# Altium PCB ATM90E2x-DB.PcbDoc
Units mil, origin at the board's own origin, x right, y up, seen from the top; angles counter-clockwise.
Board outline 4724.41 x 3543.31 mil, 2 copper layers (Top Layer, Bottom Layer); 87 components, 54 nets, 223 pads, 118 vias.
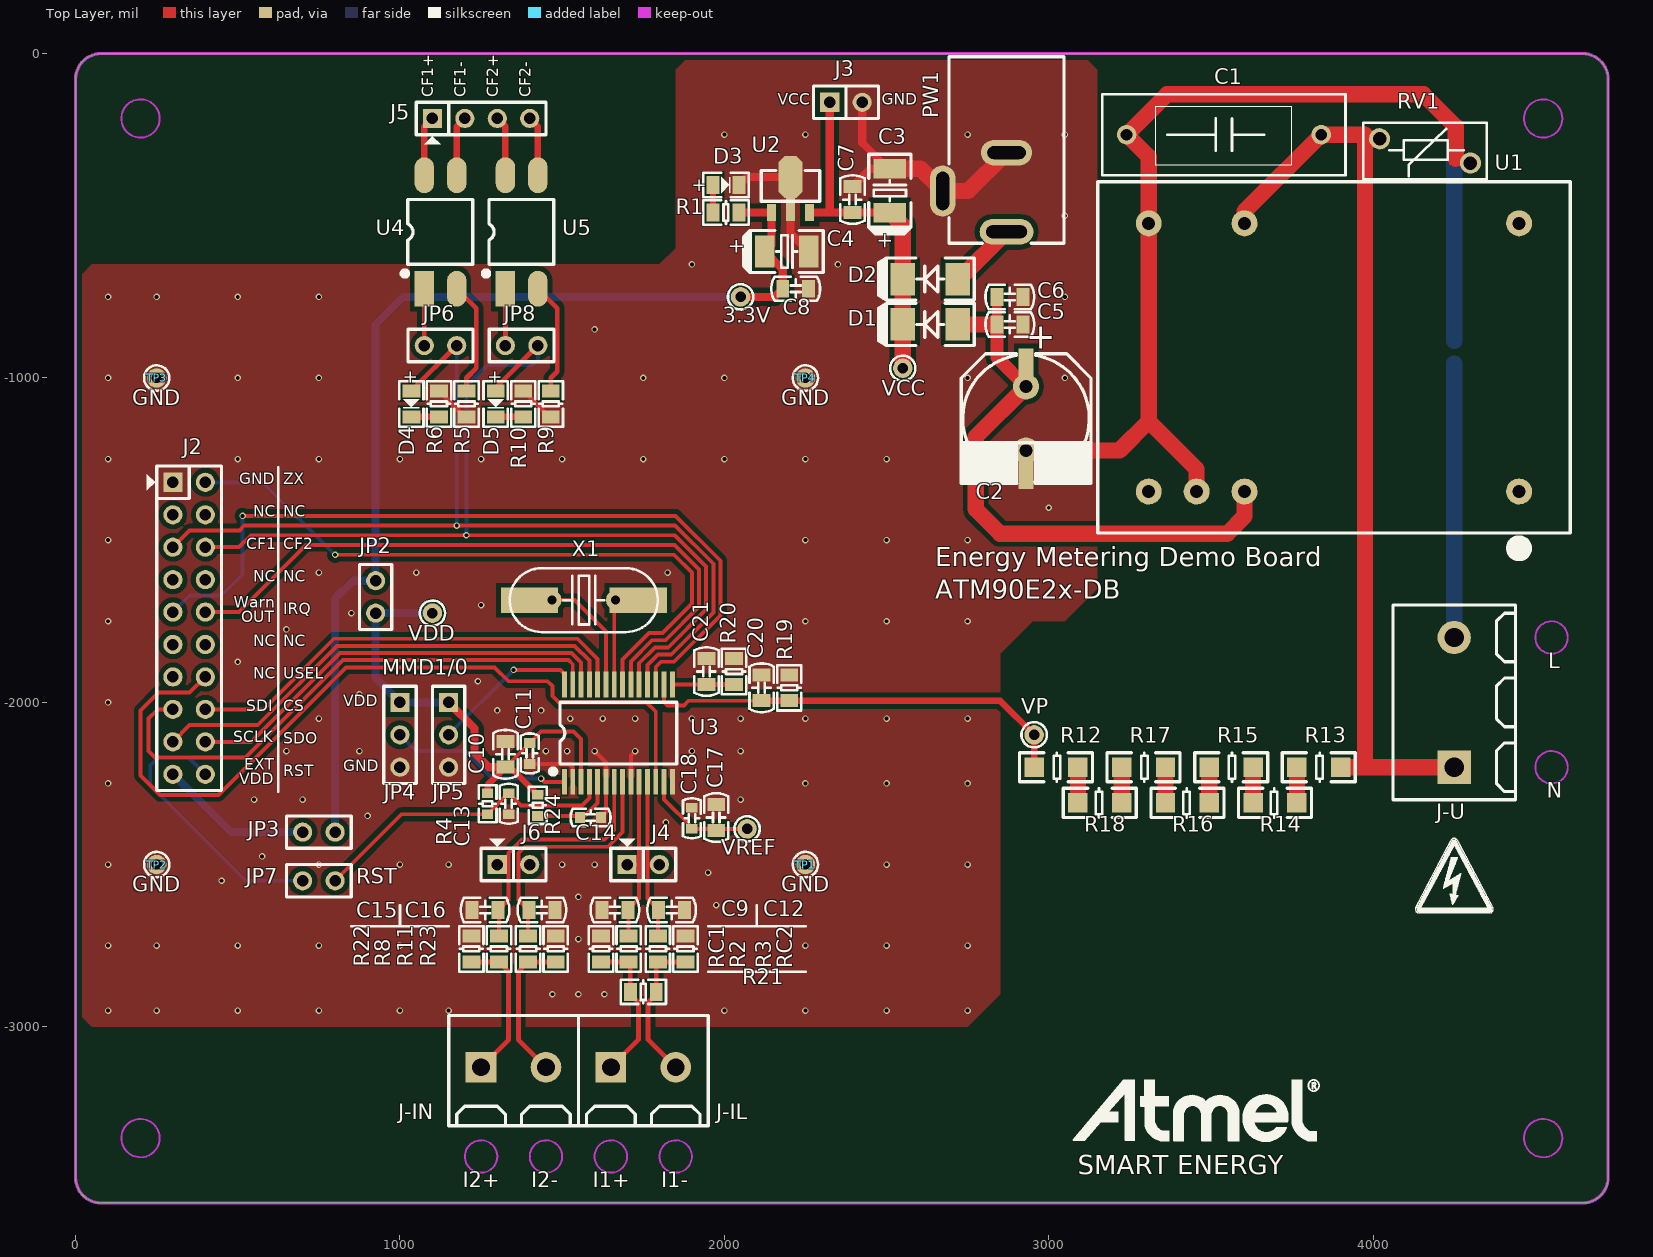
[diagram p0: Top Layer view]
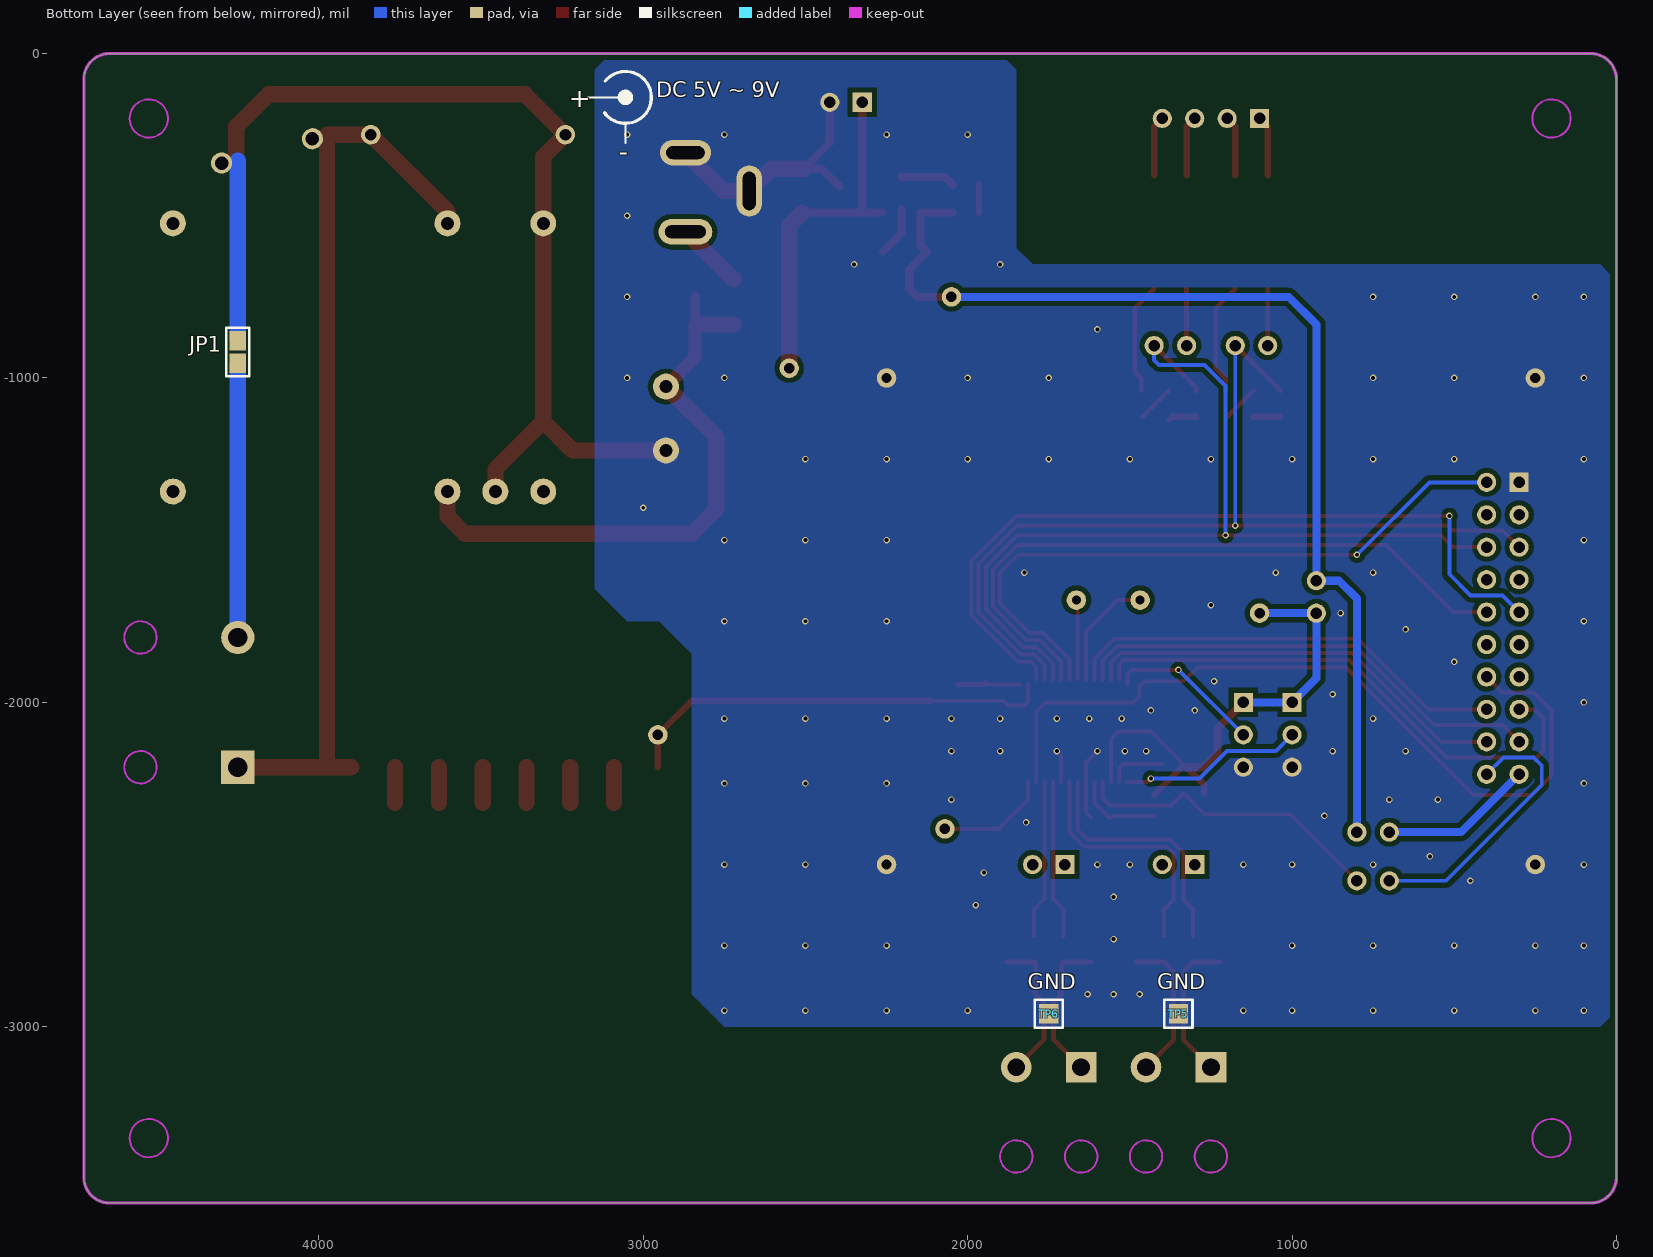
[diagram p1: Bottom Layer view, seen from below]
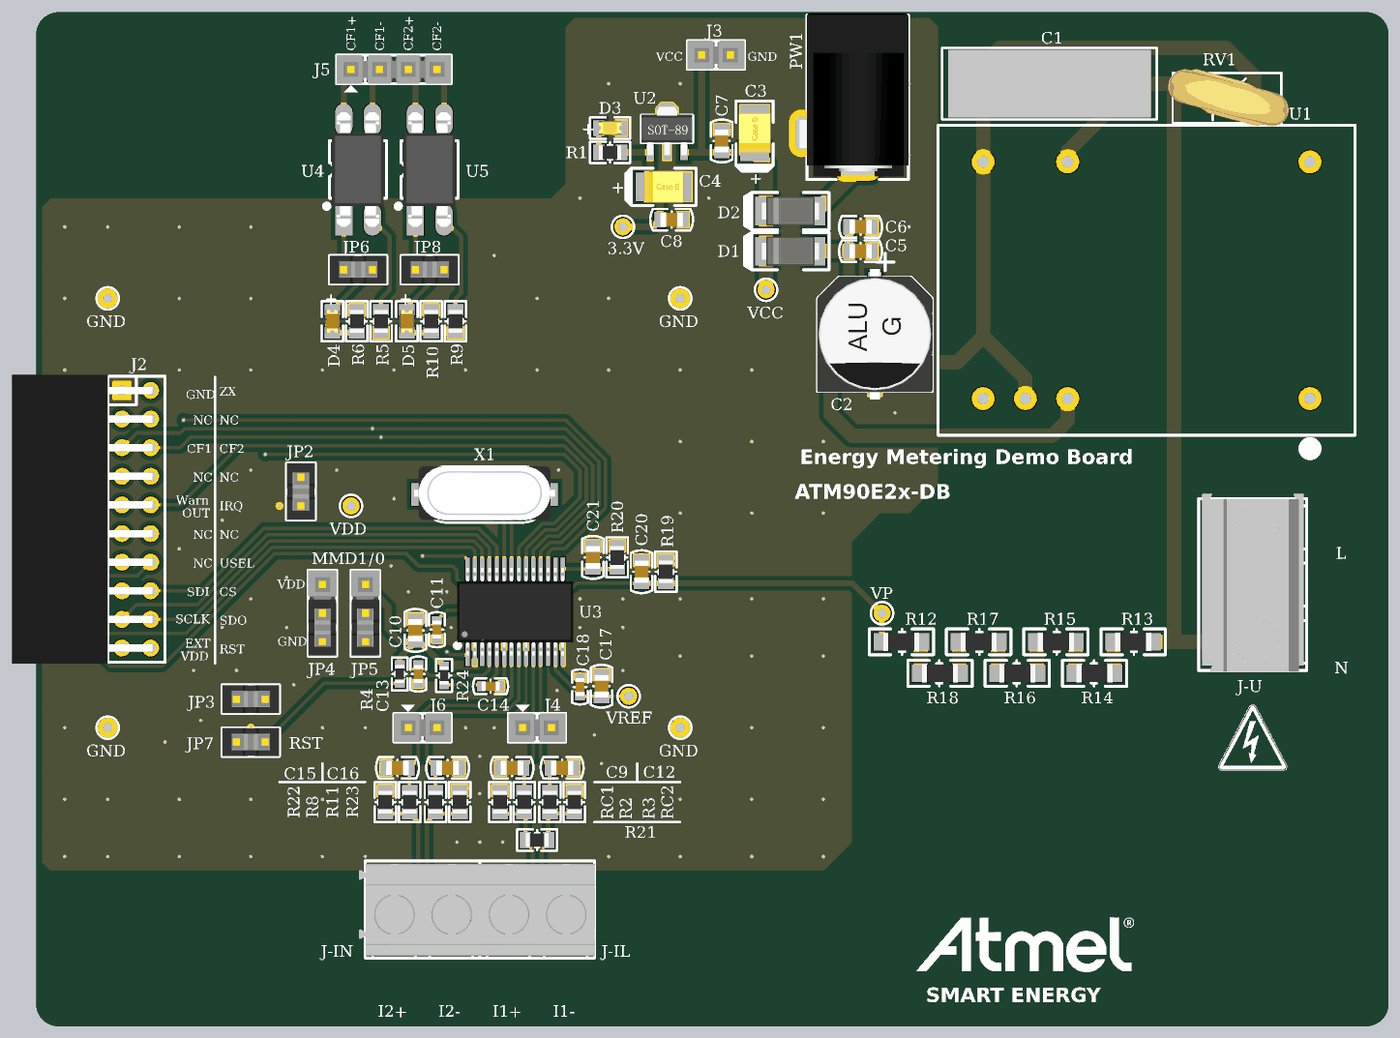
[diagram p2: 3D render of the assembled board from above, using the file's embedded part models]

## Layer stack, top to bottom
Top Layer: signal copper 1.4
Dielectric: dielectric 12.6, FR-4, Dk 4.8
Bottom Layer: signal copper 1.4

## Board outline
0,-3464.57 ccw(c78.74,-3464.57) 78.74,-3543.31 4645.67,-3543.31 ccw(c4645.67,-3464.57) 4724.41,-3464.57 4724.41,-78.74 ccw(c4645.67,-78.74) 4645.67,0 78.74,0 ccw(c78.74,-78.74) 0,-78.74

## Design rules (kind name [scope] priority, off if disabled: settings)
Clearance SSOP-28 [InComponent('U3')] p1: gap=6
Clearance Polygon [IsRegion] p2: gap=15
Clearance [All] p3: gap=10
MinimumSolderMaskSliver [All] p1 off: minsoldermaskwidth=10
NetAntennae [All] p1 off: netantennaetolerance=0
PolygonConnect [All] p1: connectstyle=Direct reliefconductorwidth=20 reliefentries=4 polygonreliefangle="90 Angle" airgapwidth=15
RoutingVias [All] p1: holewidth=28 width=50 viastyle="Through Hole" minholewidth=28 minwidth=50 maxholewidth=28 maxwidth=50
SilkToSilkClearance [All] p1 off: silktosilkclearance=10
SilkscreenOverComponentPads [All] p1 off: minsilkscreentomaskgap=10
SolderMaskExpansion [All] p1: expansion=4
Width [All] p1: maxlimit=100 minlimit=8 preferedwidth=10
24 further rules are at their usual default settings.

## Components (designator, comment, footprint, x,y, rotation, side; value= is the part's Value field where it differs from the comment)
3.3V "TEST-POINT" TP 2050,-750 r0 top
C1 "100pF" C_FILM_600 3840,-250 r180 top
C2 "220uF" C_ALUM_MIX_10X10 2930,-1125 r180 top
C3 "22uF" C_TANT_B3528 2510,-490 r90 top
C4 "22uF" C_TANT_B3528 2125,-610 r0 top
C5 "10uF" C0805 2920,-835 r180 top
C6 "0.1uF" C0805 2920,-750 r180 top
C7 "0.1uF" C0805 2395,-410 r270 top
C8 "0.1uF" C0805 2260,-725 r180 top
C9 "330nF" C0805 1622.5,-2640 r0 top
C10 "10uF" C0805 1325,-2200 r90 top
C11 "0.1uF" C0603 1400,-2125 r270 top
C12 "330nF" C0805 1797.5,-2640 r0 top
C13 "0.1uF" C0603 1335,-2345 r90 top
C14 "0.1uF" C0603 1620,-2355 r180 top
C15 "33nF" C0805 1222.5,-2640 r0 top
C16 "33nF" C0805 1397.5,-2640 r0 top
C17 "4.7uF" C0805 1975,-2315 r270 top
C18 "0.1uF" C0603 1900,-2325 r270 top
C20 "33nF" C0805 2115,-1915 r270 top
C21 "33nF" C0805 1945,-1865 r270 top
D1 "1N4007" "SMA DO-214AC" 2720,-835 r180 top
D2 "1N4007" "SMA DO-214AC" 2720,-695 r180 top
D3 "Yellow" LED-0805Y 2005,-405 r0 top
D4 "Red" LED-0805R 1035,-1080 r270 top
D5 "Red" LED-0805R 1295,-1080 r270 top
J2 "HDR2X10" HDR2X10 300,-1321.65 r270 top locked
J3 "HDR1X2" HDR1X2 2325,-150 r0 top
J4 "CON-2" HDR1X2(UPER) 1700,-2500 r0 top
J5 "HDR1X4" HDR1X4 1100,-200 r0 top
J6 "CON-2" HDR1X2(UPER) 1300,-2500 r0 top
J-IL "" TE-1776119-2 1650,-3125 r0 top
J-IN "" TE-1776119-2 1250,-3125 r0 top
J-U "" TE-282843-2 4250,-2200 r90 top
JP1 "JMP" JMP-SMD 4250,-955 r90 bottom
JP2 "JMP" JMP 925,-1625 r270 top (schematic designator JP7)
JP3 "JMP" JMP 800,-2400 r180 top (schematic designator JP7)
JP4 "JMP3" JMP3 1000,-2000 r270 top (schematic designator JP3)
JP5 "JMP3" JMP3 1150,-2000 r270 top (schematic designator JP4)
JP6 "JMP" JMP 1175,-900 r180 top
JP7 "JMP" JMP 700,-2550 r0 top
JP8 "JMP" JMP 1425,-900 r180 top
PW1 "PowerJack" POWERJACKET2.5 2870,-549.37 r180 top
R1 "510R" R0805 1965,-490 r0 top
R2 "100R" R0805 1705,-2720 r270 top
R3 "100R" R0805 1795,-2720 r270 top
R4 "10K" R0603 1270,-2345 r90 top
R5 "510R" R0805 1205,-1120 r90 top
R6 "510R" R0805 1120,-1040 r270 top
R8 "1K" R0805 1305,-2720 r270 top
R9 "510R" R0805 1465,-1120 r90 top
R10 "510R" R0805 1380,-1040 r270 top
R11 "1K" R0805 1395,-2720 r270 top
R12 "120K" R1206 3090,-2200 r180 top
R13 "120K" R1206 3900,-2200 r180 top
R14 "120K" R1206 3630,-2310 r0 top
R15 "120K" R1206 3630,-2200 r180 top
R16 "120K" R1206 3360,-2310 r0 top
R17 "120K" R1206 3360,-2200 r180 top
R18 "120K" R1206 3090,-2310 r0 top
R19 "1K" R0805 2200,-1915 r270 top
R20 "1K" R0805 2030,-1865 r270 top
R21 "51R" R0805 1790,-2892.5 r180 top
R22 "2R4" R0805 1220,-2720 r270 top
R23 "2R4" R0805 1480,-2800 r90 top
R24 "0R" R0603 1425,-2350 r90 top
RC1 "2R4" R0805 1620,-2720 r270 top
RC2 "2R4" R0805 1880,-2800 r90 top
RV1 "RES-V" VDRS10P510BSE 4160,-300 r270 top
TP1 "GND" TP 2250,-2500 r0 top (schematic designator GND)
TP2 "GND" TP 250,-2500 r0 top
TP3 "GND" TP 250,-1000 r0 top (schematic designator TP6)
TP4 "GND" TP 2250,-1000 r0 top (schematic designator TP5)
TP5 "GND" TP-SMD 1350,-2960 r180 bottom (schematic designator TP8)
TP6 "GND" TP-SMD 1750,-2960 r180 bottom (schematic designator TP9)
U1 "TMLM04109" TMLM04112 4450,-1350 r180 top
U2 "78L33" SOT-89 2145,-490 r0 top
U3 "ATM90E25" SSOP-28 1507,-2245 r90 top
U4 "PS2501" PS2501L-1 1075,-725 r90 top
U5 "PS2501" PS2501L-1 1325,-725 r90 top
VCC "TEST-POINT" TP 2550,-970 r0 top
VDD "TEST-POINT" TP 1100,-1725 r0 top
VP "TEST-POINT" TP 2955,-2100 r0 top
VREF "TEST-POINT" TP 2070,-2390 r0 top
X1 "8.192MHz" XTAL-MIX-49 1468.15,-1685 r0 top
? "Comment" Logo-ATMEL 3075,-3350 r0 top
? "Comment" "HIGH VOLTAGE (40%)" 4250,-2450 r0 top

## Footprints (in the part's own frame and the unit in brackets; to place one, negate y for a bottom-side part, rotate by r counter-clockwise, add the part's x,y. Pads: shape width x height; smd on the part's side, far side on the other; paste and mask are expansions set on the pad)
C0603 [mil] "C0603"
  rect 30x35 smd: 1(0,0) 2(65,0)
  silkscreen extent -29,-28 94,28, body extent 1,-16 64,16, height 35
C0805 [mil] "C0805"
  rect 40x55 smd: 1(0,0) 2(80,0)
  silkscreen extent -35,-38 115,38, body extent 1,-25 79,25, height 39
C_ALUM_MIX_10X10 [mil] "C_ALUM_MIX_10x10"
  round 80 hole 40: 1(0,-98.43) 2(0,98.43)
  rect 47.25x137.79 smd: 1(0,-147.64) 2(0,147.64)
  silkscreen extent -200,-200 200,200, body extent -203,-228 203,228, height 402
C_FILM_600 [mil]
  round 60 hole 36: 1(0,0) 2(600,0)
  silkscreen extent -75,-125 675,125, body extent -54,-118 654,118, height 111
C_TANT_B3528 [mil] "C_TANT_B3528"
  rect 60x100 smd: 1(0,0) 2(135,0)
  silkscreen extent -65,-65 180,65, body extent -1,-55 136,55, height 75
HDR1X2 [mm] "Connector; Header; 2 Position"
  rect 1.5x1.5 hole 0.9: 1(0,0)
  round 1.5 hole 0.9: 2(2.54,0)
  silkscreen extent -1.27,-1.27 3.81,1.27, body extent -1.27,-1.27 3.81,1.27, height 8.38
HDR1X2(UPER) [mm]
  rect 1.5x1.5 hole 0.9: 1(0,0)
  round 1.5 hole 0.9: 2(2.54,0)
  silkscreen extent -1.27,-1.27 3.81,2.03, body extent -1.27,-1.27 3.81,1.27, height 8.38
HDR1X4 [mm]
  rect 1.5x1.5 hole 0.9: 1(0,0)
  round 1.5 hole 0.9: 2(2.54,0) 3(5.08,0) 4(7.62,0)
  silkscreen extent -1.27,-2.03 8.89,1.27, body extent -1.27,-1.27 8.89,1.27, height 8.38
HDR2X10 [mm]
  rect 1.5x1.5 hole 0.9: 1(0,0)
  round 1.5 hole 0.9: 2(0,2.54) 3(2.54,0) 4(2.54,2.54) 5(5.08,0) 6(5.08,2.54) 7(7.62,0) 8(7.62,2.54) 9(10.16,0) 10(10.16,2.54) 11(12.7,0) 12(12.7,2.54) 13(15.24,0) 14(15.24,2.54) 15(17.78,0) 16(17.78,2.54) 17(20.32,0) 18(20.32,2.54) 19(22.86,0) 20(22.86,2.54)
  silkscreen extent -1.27,-2.03 24.13,3.81, body extent -1.4,-9.77 24.25,2.83, height 5.04
"HIGH VOLTAGE (40%)" [mil]
  silkscreen extent -120,-199 120,32
JMP [mm] "JMP"
  round 1.5 hole 0.9: 1(0,0) 2(2.54,0)
  silkscreen extent -1.27,-1.27 3.81,1.27, body extent -1.27,-1.27 3.81,1.27, height 8.51
JMP3 [mm] "JMP-SMD"
  rect 1.5x1.5 hole 0.9: 1(0,0)
  round 1.5 hole 0.9: 2(2.54,0) 3(5.08,0)
  silkscreen extent -1.27,-1.27 6.35,1.27, body extent -1.27,-1.27 6.35,1.27, height 8.51
JMP-SMD [mil] "JMP-SMD"
  rect 60x50 smd: 1(0,0) 2(70,0)
  silkscreen extent -40,-35 110,35
LED-0805R [mil] "LED 0805, Red"
  rect 40x55 smd: A(-40,0) K(40,0)
  silkscreen extent -70,-38 70,38, body extent -40,-25 40,25, height 43
LED-0805Y [mil] "LED 0805, Yellow"
  rect 40x55 smd: A(-40,0) K(40,0)
  silkscreen extent -70,-38 70,38, body extent -40,-25 40,25, height 43
Logo-ATMEL [mil]
  silkscreen extent 0,-4 760,187
POWERJACKET2.5 [mm] "PowerJacket2.5"
  oval 4.2x2 hole 1 slot 3.2 at 0 deg: 1(0,0)
  oval 4x2 hole 1 slot 3 at 0 deg: 2(0,-6.2)
  oval 2x4 hole 1 slot 3 at 90 deg: 3(5,-3.2)
  silkscreen extent -4.5,-13.7 4.5,0.9, body extent -4.5,-13.85 5.3,0.65, height 11.03
PS2501L-1 [mil] "PS2501L-1"
  rect 110.24x60 smd: 1(0,0)
  oval 110.24x60 smd: 2(0,-100) 3(350,-100) 4(350,0)
  silkscreen extent 39,-149 275,68, body extent -25,-140 375,41, height 152
R0603 [mil] "R0603"
  rect 30x35 smd: 1(0,0) 2(65,0)
  silkscreen extent -25,-28 90,28, body extent 1,-16 64,16, height 16
R0805 [mil] "R0805"
  rect 40x55 smd: 1(0,0) 2(80,0)
  silkscreen extent -30,-38 110,38, body extent 1,-25 79,25, height 20
R1206 [mil] "R1206"
  rect 60x60 smd: 1(0,0) 2(135,0)
  silkscreen extent -45,-45 180,45, body extent 5,-31 130,32, height 22
"SMA DO-214AC" [mil] "DIODE, SMA DO-214AC"
  rect 75x100 smd: A(0,0) K(170,0)
  silkscreen extent -50,-65 245,65, body extent -17,-51 187,51, height 95
SOT-89 [mm] "SOT-89"
  rect 0.7x1.35 smd: 1(0,0) 3(3,0)
  rect 0.7x1.8 smd: 2(1.5,0.225)
  oct 1.9x3.3 smd: 2(1.5,2.775)
  silkscreen extent -0.79,0.88 3.79,3.29, body extent -0.75,-0.24 3.75,4.05, height 1.51
SSOP-28 [mm] "SSOP-28"
  rect 2x0.38 smd: 1(0,0) 2(0,-0.65) 3(0,-1.3) 4(0,-1.95) 5(0,-2.6) 6(0,-3.25) 7(0,-3.9) 8(0,-4.55) 9(0,-5.2) 10(0,-5.85) 11(0,-6.5) 12(0,-7.15) 13(0,-7.8) 14(0,-8.45) 15(7.62,-8.45) 16(7.62,-7.8) 17(7.62,-7.15) 18(7.62,-6.5) 19(7.62,-5.85) 20(7.62,-5.2) 21(7.62,-4.55) 22(7.62,-3.9) 23(7.62,-3.25) 24(7.62,-2.6) 25(7.62,-1.95) 26(7.62,-1.3) 27(7.62,-0.65) 28(7.62,0)
  silkscreen extent 0.61,-8.8 6.22,1.09, body extent -0.07,-9.39 7.69,0.94, height 2.15
TE-282843-2 [mm]
  rect 2.6x2.6 hole 1.5: 1(0,0)
  round 2.6 hole 1.5: 2(10.16,0)
  silkscreen extent -2.54,-4.8 12.7,4.8, body extent -2.6,-4.51 13.14,4.49, height 15.22
TE-1776119-2 [mm]
  rect 2.4x2.4 hole 1.4: 1(0,0)
  round 2.4 hole 1.4: 2(5.08,0)
  silkscreen extent -2.54,-4.57 7.62,4.06, body extent -3.09,-4.39 7.67,3.81, height 10.04
TMLM04112 [mil] "TMLM04112"
  round 80 hole 40: 1(0,0) 2(846.45,0) 3(994.09,0) 4(1141.73,0) 5(1141.73,-826.77) 6(846.45,-826.77) 7(0,-826.77)
  silkscreen extent -157,-955 1299,195, body extent -159,-953 1301,127, height 675
TP [mil] "TP"
  round 60 hole 32: 1(0,0)
  silkscreen extent -39,-39 39,39
TP-SMD [mil] "JMP-SMD"
  rect 60x60 smd: 1(0,0)
  silkscreen extent -43,-43 43,43
VDRS10P510BSE [mil] "VDRS10P510BSE"
  round 65 hole 42: 1(-37.5,-140) 2(37.5,140)
  silkscreen extent -87,-190 88,190, body extent -123,-222 123,232, height 472
XTAL-MIX-49 [mm]
  rect 4.5x2 smd: 1(-1.75,0) 2(6.75,0)
  round 1.524 hole 0.711: 1(0,0) 2(5,0)
  silkscreen extent -3.3,-2.5 8.3,2.5, body extent -3.75,-2.29 8.75,2.51, height 4.05

## Part data
C1: library part CAP-FILM
C2: library part CAP-ALUM
C3 C4: library part CAP-TANT
C5 C6 C7 C8 C9 C10 C11 C12 C13 C14 C15 C16 C17 C18 C20 C21: library part CAP
D1 D2: library part DIODE
D3 D4 D5: library part LED
J-IL J-IN J-U: library part Terminal-Screw-2
R1 R2 R3 R4 R5 R6 R8 R9 R10 R11 R12 R13 R14 R15 R16 R17 R18 R19 R20 R21 R22 R23 R24 RC1 RC2: library part RES
TP1 TP2 TP3 TP4 TP5 TP6: library part TEST-POINT
U1: library part TMLM04112
U2: library part 78LXX
U4 U5: library part NEC2501, "NEC2501"
X1: library part XTAL-T

## Via types
v1: diameter 20, hole 12, Top Layer to Bottom Layer, 118 vias

## Nets (pads, with @x,y where several pads share a name; then routed paths per layer and width w, separated by ;. In a path a pad name is that pad's centre, name@x,y a point inside that pad or via, vN(x,y) a via of type N, cw(c..) or ccw(c..) an arc to the next point about the centre after c; other vN are vias at no path point)
AVDD: C14.2 R24.1 U3.5 | length 270.1
  Top Layer w12: R24.1 1550,-2350 C14.2 1564.36,-2355 1609.36,-2310 U3.5
CF1: D4.A J2.5 JP6.1 U3.18 | length 2960.8
  Top Layer w12: J2.5 351.65,-1470 505,-1470 520,-1455 v1(1175,-1455) 1848.34,-1455 1966,-1572.66 1966,-1722.89 1836.22,-1852.67 1795.25,-1852.67 1762.9,-1885.01 U3.18@1762.9,-1930.04
  Top Layer w15: D4.A JP6.1
  Bottom Layer w12: v1(1175,-1455) JP6.1
CF2: D5.A J2.6 JP8.1 U3.19 | length 3009.1
  Top Layer w12: J2.6 503.35,-1521.65 540,-1485 v1(1205,-1485) 1847.23,-1485 1944,-1581.77 1944,-1713.77 1827.11,-1830.67 1786.14,-1830.67 1737.31,-1879.49 U3.19@1737.31,-1930.04
  Top Layer w15: D5.A 1295,-1030 JP8.1
  Bottom Layer w12: v1(1205,-1485) 1205,-1025 1270,-960 1410,-960 1425,-945 JP8.1
CS: J2.16 U3.24 | length 1389.2
  Top Layer w12: J2.16 578.9,-2021.65 796.55,-1804 1547.34,-1804 1609.36,-1866.02 U3.24@1609.36,-1930.04
GND: C1.2 C2.2 C3.2 C4.2 C5.1 C6.1 C7.1 C8.1 C9.1 C10.2 C11.2 C12.2 C13.1 C14.1 C15.1 C16.2 C17.1 C18.1 C20.1 C21.1 D3.K J2.1 J3.2 JP1.2 JP4.3 JP5.3 PW1.2 PW1.3 R5.1 R6.1 R9.1 R10.1 R19.1 R20.1 R22.1 R23.2 RC1.1 RC2.2 RV1.2 TP1.1 TP2.1 TP3.1 TP4.1 TP5.1 TP6.1 U1.3 U1.5 U2.2 U3.2 U3.6 U3.9 U3.14 | length 5236.4
  Top Layer w12: C11.2 1400.37,-2189.63 1521.11,-2189.63 1532.59,-2201.11 U3.2 ; v1(1600,-2150) 1634.95,-2184.95 U3.6 1634.95,-2340.05 C14.1 ; U3.9 1711.72,-2163.28 v1(1725,-2150)
  Top Layer w15: R6.1 R5.1@1200,-1120 ; R10.1 R9.1@1460,-1120
  Top Layer w25: D3.K 2069.25,-380.75 U2.2@2204.06,-380.75 ; U2.2@2204.06,-481.14 2204.06,-554.06 C4.2 ; C7.1 2450,-355 2505,-355 2425,-275 J3.2
  Top Layer w50: C3.2@2505,-355 C3.2 2604.76,-355 PW1.3 2751.89,-423.39 PW1.2 ; C2.2@2930,-1223.43 3218.11,-1223.43 3308.27,-1133.27 ; U1.3 3455.91,-1280.91 3308.27,-1133.27 ; 4255,-325 4255,-225 4155,-125 3365,-125 C1.2 3308.27,-318.27 U1.5 3308.27,-1133.27
  Bottom Layer w50: JP1.2 4250,-330
  other v1: 100,-2950 250,-2950 500,-2950 750,-2950 1000,-2950 1150,-2950 2000,-2950 2250,-2950 2500,-2950 2750,-2950 1470,-2900 1550,-2900 1630,-2900 100,-2750 250,-2750 500,-2750 750,-2750 1000,-2750 2250,-2750 2500,-2750 2750,-2750 1550,-2730 1975,-2625 1550,-2600 450,-2550 1950,-2525 100,-2500 750,-2500 1000,-2500 1150,-2500 1500,-2500 1600,-2500 2500,-2500 2750,-2500 575,-2475 1820,-2370 900,-2350 550,-2300 700,-2300 2050,-2300 100,-2250 2250,-2250 2500,-2250 2750,-2250 650,-2150 875,-2150 1450,-2150 1515,-2150 1900,-2150 2050,-2150 750,-2050 1525,-2050 1625,-2050 1725,-2050 1900,-2050 2050,-2050 2250,-2050 2500,-2050 2750,-2050 1300,-2025 1435,-2025 100,-2000 875,-1975 1240,-1935 500,-1875 650,-1775 100,-1750 2250,-1750 2500,-1750 2750,-1750 850,-1725 1250,-1700 750,-1600 1050,-1600 1825,-1600 100,-1500 2250,-1500 2500,-1500 2750,-1500 3000,-1400 100,-1250 500,-1250 750,-1250 1000,-1250 1250,-1250 1500,-1250 1750,-1250 2000,-1250 2250,-1250 2500,-1250 100,-1000 500,-1000 750,-1000 1750,-1000 2000,-1000 2750,-1000 3050,-1000 1600,-850 100,-750 250,-750 500,-750 750,-750 3050,-750 1900,-650 2350,-650 3050,-500 2000,-250 2250,-250 2750,-250 3050,-250
I1N: C12.1 J4.2 R3.1 U3.11 | length 526.4
  Top Layer w12: U3.11 1762.9,-2500 ; R3.1 C12.1@1795,-2640 ; C12.1 1762.9,-2605.41 1762.9,-2500 ; J4.2 1762.9,-2500
I1P: C9.2 J4.1 R2.1 U3.10 | length 526.7
  Top Layer w12: J4.1 1737.31,-2500 ; C9.2 1737.31,-2605.18 1737.31,-2500 ; R2.1 C9.2@1705,-2640 ; U3.10 1737.31,-2500
I2N: C16.1 J6.2 R11.1 U3.8 | length 851.4
  Top Layer w12: R11.1 1395,-2640 1365,-2610 1365,-2607.5 ; C16.1 1365,-2607.5 ; J6.2 1365,-2500 ; U3.8 1686.13,-2400 1641.13,-2445 1385,-2445 1365,-2465 1365,-2500 ; 1365,-2607.5 1365,-2500
I2P: C15.2 J6.1 R8.1 U3.7 | length 852.8
  Top Layer w12: J6.1 1335,-2500 ; C15.2 1335,-2607.5 ; R8.1 1305,-2640 1335,-2610 1335,-2607.5 ; U3.7 1660.54,-2393.59 1631.13,-2423 1375.89,-2423 1335,-2463.89 1335,-2500 ; 1335,-2607.5 1335,-2500
IRQ: J2.10 U3.20 | length 2089.3
  Top Layer w12: J2.10 503.35,-1721.65 710,-1515 1846.11,-1515 1922,-1590.89 1922,-1704.66 1817.99,-1808.67 1777.02,-1808.67 1711.72,-1873.97 U3.20@1711.72,-1930.04
L: J-U.2 JP1.1 | length 845
  Bottom Layer w50: J-U.2 JP1.1
N: C1.1 J-U.1 R13.1 RV1.1 U1.6 | length 2806.2
  Top Layer w50: U1.6 3603.55,-486.45 C1.1 3975,-250 3975,-2200 ; R13.1 J-U.1
Net3.3V_1: 3.3V.1 C4.1 C8.2 JP2.1 JP3.1 R1.2 U2.1 | length 3324.4
  Top Layer w25: R1.2 U2.1 2145,-590 C4.1 2180,-665 C8.2 2155,-750 3.3V.1
  Bottom Layer w25: JP3.1 800,-1680 855,-1625 JP2.1 925,-835 1010,-750 3.3V.1
NetC2_1: C2.1 C5.2 C6.2 D1.A U1.2 | length 1824.7
  Top Layer w30: C5.2 C6.2
  Top Layer w40: C5.2 2840,-936.57 C2.1@2930,-1026.57
  Top Layer w50: D1.A C5.2@2830,-835 ; C2.1@2930,-1026.57 2775,-1181.57 2775,-1405 2850,-1480 3550,-1480 3603.55,-1426.45 U1.2
NetC13_2: C13.2 JP7.2 R4.1 U3.4 | length 970.5
  Top Layer w12: JP7.2 1005,-2345 R4.1 C13.2 1372.5,-2317.5 1561.27,-2317.5 1583.77,-2295 U3.4
NetC17_2: C17.2 C18.2 U3.13 VREF.1 | length 350.6
  Top Layer w12: U3.13 1814.09,-2299.09 1900,-2385 C18.2 VREF.1
NetD2_A: D2.A PW1.1 | length 210.3
  Top Layer w50: D2.A 2724.37,-695 PW1.1
NetD3_A: D3.A R1.1 | length 85
  Top Layer w20: R1.1 D3.A
NetD4_K: D4.K R6.2 | length 85
  Top Layer w20: D4.K R6.2
NetD5_K: D5.K R10.2 | length 89.1
  Top Layer w15: R10.2@1370,-1120 R10.2@1380,-1130
  Top Layer w20: D5.K R10.2@1370,-1120
NetJ5_1: J5.1 U4.4 | length 185.4
  Top Layer w20: U4.4 1075,-225 J5.1
NetJ5_2: J5.2 U4.3 | length 185.4
  Top Layer w20: U4.3 1175,-225 J5.2
NetJ5_3: J5.3 U5.4 | length 185.4
  Top Layer w20: J5.3 1325,-225 U5.4
NetJ5_4: J5.4 U5.3 | length 185.4
  Top Layer w20: J5.4 1425,-225 U5.3
NetJ-IL_1: J-IL.1 R2.2 R21.2 RC1.2 | length 452.6
  Top Layer w15: RC1.2 R2.2 1710,-2805 R21.2 ; J-IL.1 1735,-3040 1735,-2925 R21.2@1710,-2900 ; R21.2@1715,-2895 R21.2@1715,-2892.5
NetJ-IL_2: J-IL.2 R3.2 R21.1 RC2.1 | length 459.7
  Top Layer w12: R21.1@1795,-2895 R21.1@1795,-2892.5
  Top Layer w15: R21.1 1790,-2805 R3.2 RC2.1 ; R21.1@1795,-2895 1765,-2925 1765,-3040 J-IL.2
NetJ-IN_1: J-IN.1 R8.2 R22.2 | length 457.6
  Top Layer w15: R22.2 R8.2 1335,-2830 1335,-3040 J-IN.1
NetJ-IN_2: J-IN.2 R11.2 R23.1 | length 457.6
  Top Layer w15: J-IN.2 1365,-3040 1365,-2830 R11.2 R23.1
NetJP4_2: JP4.2 U3.1 | length 567.1
  Top Layer w12: v1(1435,-2235) 1445,-2245 U3.1
  Bottom Layer w12: JP4.2 1050,-2150 1200,-2150 1285,-2235 v1(1435,-2235)
NetJP5_2: JP5.2 U3.28 | length 477.8
  Top Layer w12: v1(1350,-1900) 1495,-1900 1507,-1912 U3.28
  Bottom Layer w12: JP5.2 v1(1350,-1900)
NetJP6_2: JP6.2 U4.1 | length 175
  Top Layer w15: JP6.2 U4.1
NetJP8_2: JP8.2 U5.1 | length 175
  Top Layer w15: JP8.2 U5.1
NetR5_2: R5.2 U4.2 | length 352.3
  Top Layer w15: U4.2 1235,-785 1235,-970 1205,-1000 R5.2
NetR9_2: R9.2 U5.2 | length 348.1
  Top Layer w15: U5.2 1485,-785 1485,-980 1465,-1000 R9.2
NetR12_1: R12.1 R18.1 | length 110
  Top Layer w50: R18.1 R12.1
NetR13_2: R13.2 R14.2 | length 110
  Top Layer w50: R14.2 R13.2
NetR14_1: R14.1 R15.1 | length 110
  Top Layer w50: R14.1 R15.1
NetR15_2: R15.2 R16.2 | length 110
  Top Layer w50: R16.2 R15.2
NetR16_1: R16.1 R17.1 | length 110
  Top Layer w50: R16.1 R17.1
NetR17_2: R17.2 R18.2 | length 110
  Top Layer w50: R18.2 R17.2
NetU3_22: U3.22 X1.2 | length 240.6
  Top Layer w12: U3.22@1660.54,-1930.04 X1.2@1660.54,-1689.46
NetU3_23: U3.23 X1.1 | length 355.4
  Top Layer w12: X1.1@1468.15,-1685 1538.54,-1685 1634.95,-1781.41 U3.23@1634.95,-1930.04
RST: J2.20 JP7.1 | length 853.9
  Bottom Layer w12: J2.20 348.35,-2170 255,-2170 230,-2195 230,-2255 525,-2550 JP7.1
SCLK: J2.17 U3.25 | length 1483.6
  Top Layer w12: J2.17 351.65,-2070 561.66,-2070 805.66,-1826 1538.23,-1826 1583.77,-1871.55 U3.25@1583.77,-1930.04
SDI: J2.15 U3.27 | length 1679.5
  Top Layer w12: J2.15 253.35,-2021.65 225,-2050 225,-2150 245,-2170 523.89,-2170 823.89,-1870 1520,-1870 1532.59,-1882.59 U3.27@1532.59,-1930.04
SDO: J2.18 U3.26 | length 1306.5
  Top Layer w12: 430,-2121.65 541.12,-2121.65 814.77,-1848 1529.11,-1848 1558.18,-1877.07 U3.26@1558.18,-1930.04
USEL: J2.14 U3.12 | length 2509.6
  Top Layer w12: J2.14 351.65,-1970 255,-1970 200,-2025 200,-2225 260,-2285 440,-2285 833,-1892 1292,-1892 1335,-1935 1455,-1935 1470,-1950 1470,-1980 1490,-2000 1760,-2000 1788.5,-2028.5 U3.12
VCC: C3.1 C7.2 D1.K D2.K J3.1 U2.3 VCC.1 | length 1083.5
  Top Layer w25: U2.3 2325,-490 ; J3.1 2325,-490 ; C3.1 C7.2 2325,-490
  Top Layer w50: C3.1 2550,-530 D2.K D1.K VCC.1
VDD: C10.1 C11.1 JP2.2 JP4.1 JP5.1 R4.2 R24.2 U3.3 VDD.1 | length 1591
  Top Layer w12: C10.1 C11.1 1435,-2090 1535,-2090 1558.18,-2113.18 U3.3
  Top Layer w20: R4.2 1270,-2255 C10.1 1340,-2200 R24.2
  Top Layer w25: JP5.1 1230,-2080 1230,-2155 1275,-2200 C10.1
  Bottom Layer w25: VDD.1 JP2.2 925,-1925 JP4.1 JP5.1
VDD_EXT: J2.19 JP3.2 | length 473.9
  Bottom Layer w25: J2.19 478.35,-2400 JP3.2
VN: C21.2 R20.2 U3.15 | length 194.5
  Top Layer w12: U3.15 1935,-1945 C21.2@1945,-1935
  Top Layer w15: C21.2 R20.2
VP: C20.2 R12.2 R19.2 U3.16 VP.1 | length 1349.2
  Top Layer w12: U3.16 1814.09,-1999.09 1825,-2010 1875,-2010 1890,-1995 C20.2
  Top Layer w20: C20.2 R19.2 2850,-1995 VP.1 R12.2
WARNOUT: J2.9 U3.17 | length 2446.8
  Top Layer w12: v1(515,-1425) 1849.45,-1425 1988,-1563.55 1988,-1732 1845.33,-1874.67 1804.36,-1874.67 1788.5,-1890.53 U3.17@1788.5,-1930.04
  Bottom Layer w12: J2.9 351.65,-1670 450,-1670 515,-1605 v1(515,-1425)
ZX: J2.2 U3.21 | length 2057.9
  Top Layer w12: v1(800,-1545) 1845,-1545 1900,-1600 1900,-1695.55 1808.88,-1786.67 1767.91,-1786.67 1686.13,-1868.45 U3.21@1686.13,-1930.04
  Bottom Layer w12: J2.2 576.65,-1321.65 v1(800,-1545)
pads on no net: J2.3 J2.4 J2.7 J2.8 J2.11 J2.12 J2.13 U1.1 U1.4 U1.7

## Polygon pours and split planes (outlines as drawn)
GND on Top Layer "Top Overlay-No Net" (solid, remove dead copper, pour order 2): 0,0 0,-3550 4750,-3550 4750,0
GND on Bottom Layer "Top Overlay-No Net" (solid, remove dead copper, pour order 3): 0,0 0,-3550 4750,-3550 4750,0

## Keep-outs
Keep-Out Layer:
  circle w6: c4524.41,-3343.31 r59.06
  circle w6: c1850,-3400 r50
  circle w6: c1650,-3400 r50
  circle w6: c1450,-3400 r50
  circle w6: c1250,-3400 r50
  circle w6: c4550,-2200 r50
  circle w6: c4550,-1800 r50
  circle w6: c4524.41,-200 r59.06
  circle w6: c200,-3343.31 r59.06
  circle w6: c200,-200 r59.06
  lines w10: 0,-3464.57 ccw(c78.74,-3464.57) 78.74,-3543.31 4645.67,-3543.31 ccw(c4645.67,-3464.57) 4724.41,-3464.57 4724.41,-78.74 ccw(c4645.67,-78.74) 4645.67,0 78.74,0 ccw(c78.74,-78.74) 0,-78.74 0,-3464.57

## Other copper
Top Layer:
  pour cut-out: 3100,0 3150,-50 3150,-1650 3050,-1750 2950,-1750 2850,-1850 2850,-2900 2750,-3000 50,-3000 0,-2950 0,-3550 4750,-3550 4750,0
  pour cut-out: 0,0 0,-700 50,-650 1800,-650 1850,-600 1850,-50 1900,0
Bottom Layer:
  pour cut-out: 3100,0 3150,-50 3150,-1650 3050,-1750 2950,-1750 2850,-1850 2850,-2900 2750,-3000 50,-3000 0,-2950 0,-3550 4750,-3550 4750,0
  pour cut-out: 0,0 0,-700 50,-650 1800,-650 1850,-600 1850,-50 1900,0

## Silkscreen, mask and mechanical layers (free items; w line width, h text height)
Top Overlay:
  lines w8: 625,-2275 625,-1275 ; 850,-2690 1150,-2690 ; 1000,-2690 1000,-2625 ; 1950,-2830 2250,-2830 ; 1950,-2690 2250,-2690 ; 2100,-2690 2100,-2625
  text "CF1+" at 1115,-135 h60 r90
  text "CF1-" at 1215,-135 h60 r90
  text "CF2+" at 1315,-135 h60 r90
  text "CF2-" at 1415,-135 h60 r90
  text "VCC" at 2165,-170 h60
  text "GND" at 2485,-170 h60
  text "GND" at 505,-1340 h60
  text "ZX" at 640,-1340 h60
  text "NC" at 547.9,-1440 h60
  text "NC" at 640,-1440 h60
  text "CF1" at 526.37,-1540 h60
  text "CF2" at 640,-1540 h60
  text "Energy Metering Demo Board" at 2650,-1600 h100
  text "NC" at 547.9,-1640 h60
  text "NC" at 640,-1640 h60
  text "ATM90E2x-DB" at 2650,-1700 h100
  text "Warn" at 488.29,-1720 h60
  text "IRQ" at 640,-1740 h60
  text "OUT" at 510,-1765 h60
  text "NC" at 547.9,-1840 h60
  text "NC" at 640,-1840 h60
  text "L" at 4540,-1910 h80
  text "MMD1/0" at 945,-1930 h80
  text "NC" at 547.9,-1940 h60
  text "USEL" at 640,-1940 h60
  text "VDD" at 825,-2025 h60
  text "SDI" at 526.48,-2040 h60
  text "CS" at 640,-2040 h60
  text "SCLK" at 486.41,-2135 h60
  text "SDO" at 640,-2140 h60
  text "EXT" at 520,-2220 h60
  text "GND" at 825,-2225 h60
  text "RST" at 640,-2240 h60
  text "VDD" at 505,-2265 h60
  text "N" at 4535,-2310 h80
  text "RST" at 865,-2575 h80
  text "SMART ENERGY" at 3090,-3475 h100
  text "I2+" at 1193.87,-3510 h80
  text "I2-" at 1404.97,-3510 h80
  text "I1+" at 1593.87,-3510 h80
  text "I1-" at 1804.97,-3510 h80
Bottom Overlay:
  circle w25: c3055,-135 r11.18
  lines w6: 3055,-275 3055,-220 ; 3070,-135 3170,-135
  lines w10: 3116.92,-84.34 ccw(c3055,-135) 3119.51,-182.31
  text "DC 5V ~ 9V" at 2960,-150 h80
  text "+" at 3230,-165 h60
  text "-" at 3075,-330 h60

## Text inside footprints (layer, text, board x,y; h text height)
C2: Top Overlay "+" at 3022.2,-842.01 h80 r180
C3: Top Overlay "+" at 2530,-605 h80 r90
C4: Top Overlay "+" at 2010,-630 h80
D3: Top Overlay "+" at 1900,-425 h40
D4: Top Overlay "+" at 1015,-975 h40 r270
D5: Top Overlay "+" at 1275,-975 h40 r270